# EAGLE board tgs2611-c00 (EAGLE 9.6.2)
REV: C
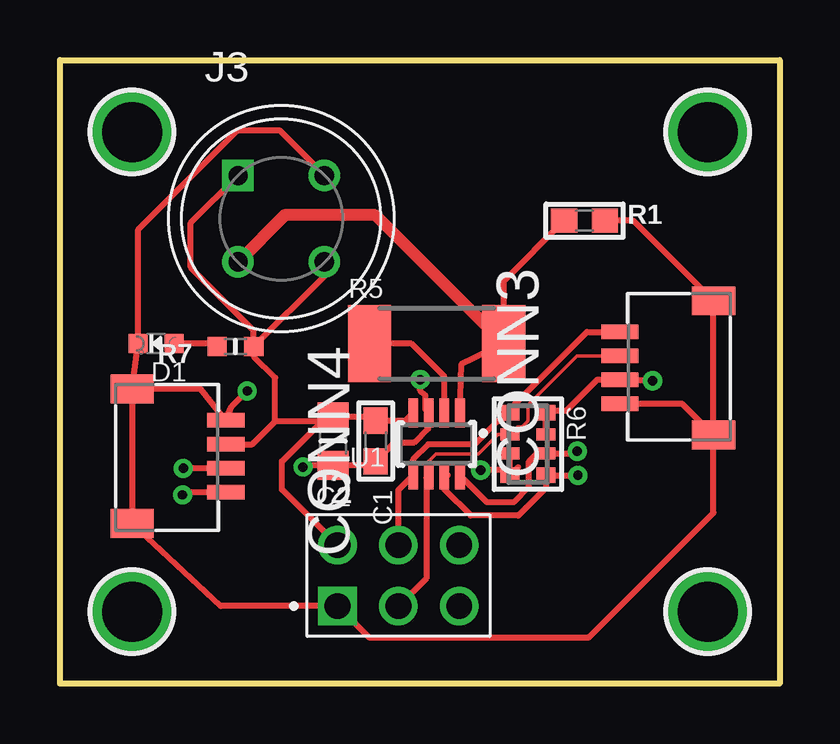
[diagram p0: board, top side]
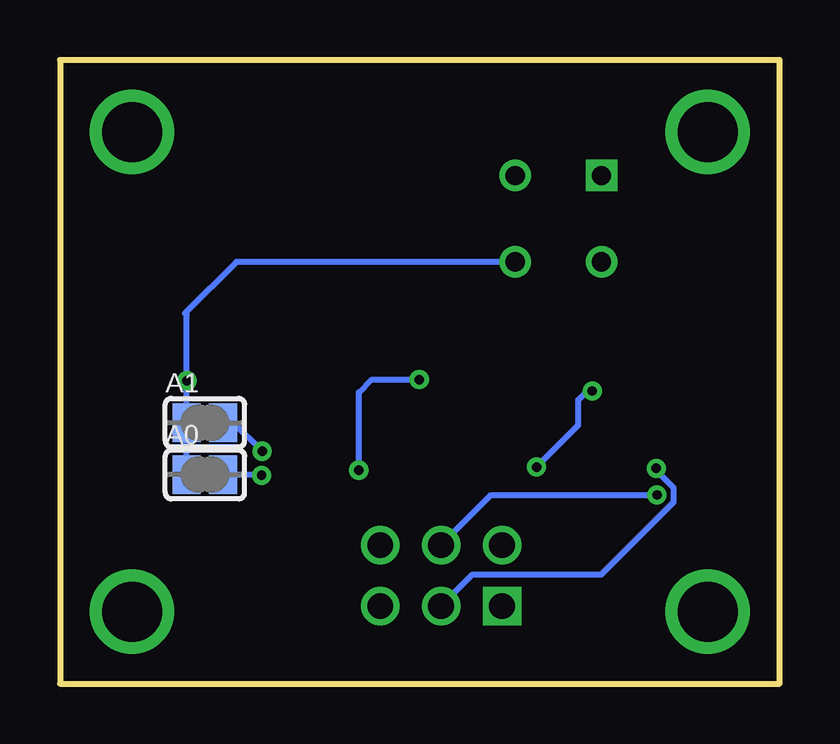
[diagram p1: board, bottom side, seen from below]

Size 30 x 26 mm. Coordinates in mm from the lower left corner, seen from the top.
Outline: 0,26 30,26 30,0 0,0 0,26
Copper layers (1*16): Top 0.035mm / dielectric 1.5mm / Bottom 0.035mm
Design rules "adafruit 7-7": minimum track width 6mil, minimum drill 15.5mil, track to track 8mil, track to pad 7mil, pad to pad 7mil, via to via 7mil, smd to smd 7mil, copper to edge 10mil, drill to drill 8mil, minimum pad ring 10mil, minimum via ring 8mil, stop-mask expansion 2mil, vias tented up to drill 20mil, thermal gap 10mil
Net classes: 1 highpower: width 0.305 mm, drill 0.483 mm; 2 lowpower: width 0.254 mm, drill 0.483 mm
bRestrict: area 13.2,5.5 to 13.3,6

## Footprints (pad centres in the part's own frame; a part is rotated, then mirrored left to right if it is on the bottom)
SOLDERJUMPER_REFLOW_NOPASTE = smd 1.168 x 1.6: 1 -0.762,0; 2 0.762,0
0603 = smd 1.1 x 1: 1 -0.85,0; 2 0.85,0
_0805MP = smd 1.2 x 1.3: 1 -1.016,0; 2 1.016,0
JST_SH4 = smd 0.6 x 1.55: 1 -1.5,2.514; 2 -0.5,2.514; 3 0.5,2.514; 4 1.5,2.514 | smd 1.2 x 1.8: MT1 -2.8,-1.386; MT2 2.8,-1.386
CHIPLED_0603_NOOUTLINE = smd 0.8 x 0.8: A 0,-0.75; C 0,0.75
HARWIN_M20-9980346 = drill 1.07 square: 1 -2.54,-1.27 | drill 1.07: 2 -2.54,1.27; 3 0,-1.27; 4 0,1.27; 5 2.54,-1.27; 6 2.54,1.27
TO180P920X780-4P = drill 0.8 square: 1 -1.8,1.8 | drill 0.8: 2 -1.8,-1.8; 3 1.8,-1.8; 4 1.8,1.8
2512 = smd 1.8 x 3.2: 1 -2.8,0; 2 2.8,0
RESPACK_4X0603 = smd 0.65 x 0.8: 1 -1.3,-0.75; 4 1.3,-0.75; 5 1.3,0.75; 8 -1.3,0.75 | smd 0.5 x 0.8: 2 -0.4,-0.75; 3 0.4,-0.75; 6 0.4,0.75; 7 -0.4,0.75
_0603MP = smd 0.8 x 0.8: 1 -0.762,0; 2 0.762,0
SOT23-8 = smd 0.4 x 1.2: 1 -0.975,-1.3; 2 -0.325,-1.3; 3 0.325,-1.3; 4 0.975,-1.3; 5 0.975,1.3; 6 0.325,1.3; 7 -0.325,1.3; 8 -0.975,1.3
MOUNTINGHOLE_2.5_PLATED = drill 2.5 pad 3.2: P$1 0,0

## Placement (x,y rotation side)
A0  [SOLDERJUMPER_REFLOW_NOPASTE]  23.95,8.71 0 bottom
A1  [SOLDERJUMPER_REFLOW_NOPASTE]  23.95,10.87 0 bottom
C1  0.1µF  [0603]  13.16,10.11 270 top
C2  10uF  [_0805MP]  11.38,10.11 270 top
CONN3  STEMMA_I2C_QT  [JST_SH4]  25.86,13.16 90 top
CONN4  STEMMA_I2C_QT  [JST_SH4]  4.4,9.48 270 top
D1  GREEN  [CHIPLED_0603_NOOUTLINE]  4.02,14.18 90 top
J2  M20-9980346  [HARWIN_M20-9980346]  14.11,4.5 0 top
J3  TGS2611-C00  [TO180P920X780-4P]  9.22,19.38 0 top
R1  10K  [0603]  21.87,19.29 0 top
R5  0.1/1% (PT2512FK-070R1L)  [2512]  15.7,14.18 0 top
R6  10K  [RESPACK_4X0603]  19.51,9.98 270 top
R7  10K  [_0603MP]  7.32,14.05 180 top
U1  INA219BIDCNT  [SOT23-8]  15.7,9.98 180 top
U$1  MOUNTINGHOLE2.5  [MOUNTINGHOLE_2.5_PLATED]  3,3 0 top
U$6  MOUNTINGHOLE2.5  [MOUNTINGHOLE_2.5_PLATED]  27,3 0 top
U$7  MOUNTINGHOLE2.5  [MOUNTINGHOLE_2.5_PLATED]  3,23 0 top
U$8  MOUNTINGHOLE2.5  [MOUNTINGHOLE_2.5_PLATED]  27,23 0 top

## Library data of the parts
A0 A1 C1 C2 CONN3 CONN4 D1 R1 R5-R7 U1 U$1 U$6-U$8 = microbuilder
J2 = M20-9980346; MANUFACTURER: HARWIN; STANDARD: Manufacturer Recommendations
J3 = TGS2611-C00; AVAILABILITY: Not in stock; CHECK_PRICES: https://www.snapeda.com/parts/TGS2611-C00/Figaro/view-part/?ref=eda; DESCRIPTION: Gas Sensor 4-Pin TO-5; MF: Figaro; MP: TGS2611-C00; PACKAGE: None; PRICE: None; SNAPEDA_LINK: https://www.snapeda.com/parts/TGS2611-C00/Figaro/view-part/?ref=snap

## Nets
ADDR0: A0.2 R6.5 U1.7
ADDR1: A1.2 R6.6 U1.8
GND: C1.2 C2.2 CONN3.1 CONN3.MT1 CONN3.MT2 CONN4.1 CONN4.MT1 CONN4.MT2 D1.C J2.1 J3.4 R1.2 R6.3 R6.4 U1.3
N$3: D1.A R7.2
SCL: CONN3.4 CONN4.4 J2.4 R6.1 U1.5
SDA: CONN3.3 CONN4.3 J2.3 R6.2 U1.6
VCC: A0.1 A1.1 C1.1 C2.1 CONN3.2 CONN4.2 J2.2 J3.1 J3.3 R6.7 R6.8 R7.1 U1.4
VIN+: J3.2 R1.1 R5.2 U1.1
VIN-: R5.1 U1.2

## Tracks (layer width: path | path; a pad name or v marks a point on that pad's centre or on a via)
ADDR0  (via drill 0.39)
  Top 0.254: v21.59,8.68 R6.5 20.26,8.16 19.11,7 17.13,7 16.02,8.1 U1.7 16.17,8.68
  Bottom 0.254: A0.2 21.62,8.71 v21.59,8.68
ADDR1  (via drill 0.39)
  Top 0.254: v21.57,9.69 21.46,9.59 R6.6 19.88,9.59 19.55,9.26 19.55,8.21 18.92,7.57 17.79,7.57 U1.8
  Bottom 0.254: A1.2 22.75,10.87 v21.57,9.69
GND  (via drill 0.39)
  Top 0.254: 18.79,8.65 R6.4 | CONN4.MT1 D1.C 3.27,18.93 7.4,23.06 9.15,23.06 11.02,21.19 J3.4 | R1.2 23.91,19.29 CONN3.MT2 CONN3.MT1 | CONN3.MT1 27.25,7.12 22.05,1.93 18.09,1.93 18.08,1.92 12.89,1.92 J2.1 6.71,3.23 CONN4.MT2 CONN4.MT1 | CONN3.MT1 25.95,11.66 CONN3.1 | v10.13,9.03 10.2,9.1 C2.2 12.99,9.1 C1.2 13.96,10.06 14.78,10.06 15.35,10.63 15.35,11.31 | v7.81,12.2 7.17,11.56 CONN4.1 5.87,12.28 CONN4.MT1 | U1.3 15.35,11.31 | 15.35,11.31 15.23,11.43 15.23,12.01 15.02,12.22 v15.02,12.68 | R6.4 R6.3 | R6.4 18.55,8.9 v17.54,8.9 | R6.4 19.1,9.02
  Bottom 0.254: v10.13,9.03 8.39,10.77 8.39,11.83 8.02,12.2 v7.81,12.2 | v17.54,8.9 17.54,12.14 17.01,12.68 v15.02,12.68
N$3
  Top 0.254: R7.2 6.43,14.18 D1.A
SCL  (via drill 0.39)
  Top 0.254: J2.4 14.11,8.07 U1.5 14.72,9.34 15.36,9.98 17.27,9.98 18.23,10.94 18.41,10.94 R6.1 18.76,11.45 21.97,14.66 CONN3.4 | CONN4.4 5.23,7.98 v5.11,7.86
  Bottom 0.254: J2.4 12.02,7.86 v5.11,7.86
SDA  (via drill 0.39)
  Top 0.152: CONN3.3 21.55,13.66 19.5,11.61 19.5,10.94 19.27,10.71 19.08,10.71 R6.2 18.25,10.38 17.44,9.57 15.67,9.57 15.38,9.28 U1.6
  Top 0.254: J2.3 15.27,4.39 15.27,8.58 U1.6 | CONN4.3 7.16,8.97 v5.14,8.97
  Bottom 0.254: J2.3 12.8,4.55 7.43,4.55 4.41,7.57 4.41,8.16 5.14,8.89 v5.14,8.97
VCC  (via drill 0.39)
  Top 0.254: CONN4.2 8.02,9.98 8.97,10.93 | 8.97,10.93 8.97,12.75 8.08,13.64 R7.1 | 10.92,10.93 11.18,10.93 C2.1 12.99,11.13 C1.1 14.4,10.96 U1.4 | 10.92,10.93 8.97,10.93 | R7.1 11.02,16.99 J3.3 | J2.2 9.26,8.09 9.26,9.27 10.92,10.93 | R7.1 8.08,14.73 5.46,17.35 5.46,19.22 J3.1 | v24.71,12.62 24.67,12.66 CONN3.2 22.39,12.66 21.11,11.38 20.35,11.38 R6.8 R6.7
  Bottom 0.254: 24.78,15.44 24.71,15.37 v24.71,12.62 A1.1 A0.1 | 24.78,15.44 | 24.78,15.44 22.64,17.58 J3.3
VIN+
  Top 0.254: R1.1 18.5,16.77 R5.2 16.74,13.31 U1.1
  Top 0.508: R5.2 13.15,19.52 9.36,19.52 J3.2
VIN-
  Top 0.254: U1.2 16.02,12.8 14.65,14.18 R5.1